# Altium PCB SmartHome V3.PcbDoc (part 1 of 3)
Units mil, origin at the board's own origin, x right, y up, seen from the top; angles counter-clockwise.
Board outline 9055.12 x 5905.51 mil, 2 copper layers (Top Layer, Bottom Layer); 247 components, 227 nets, 963 pads, 444 vias.
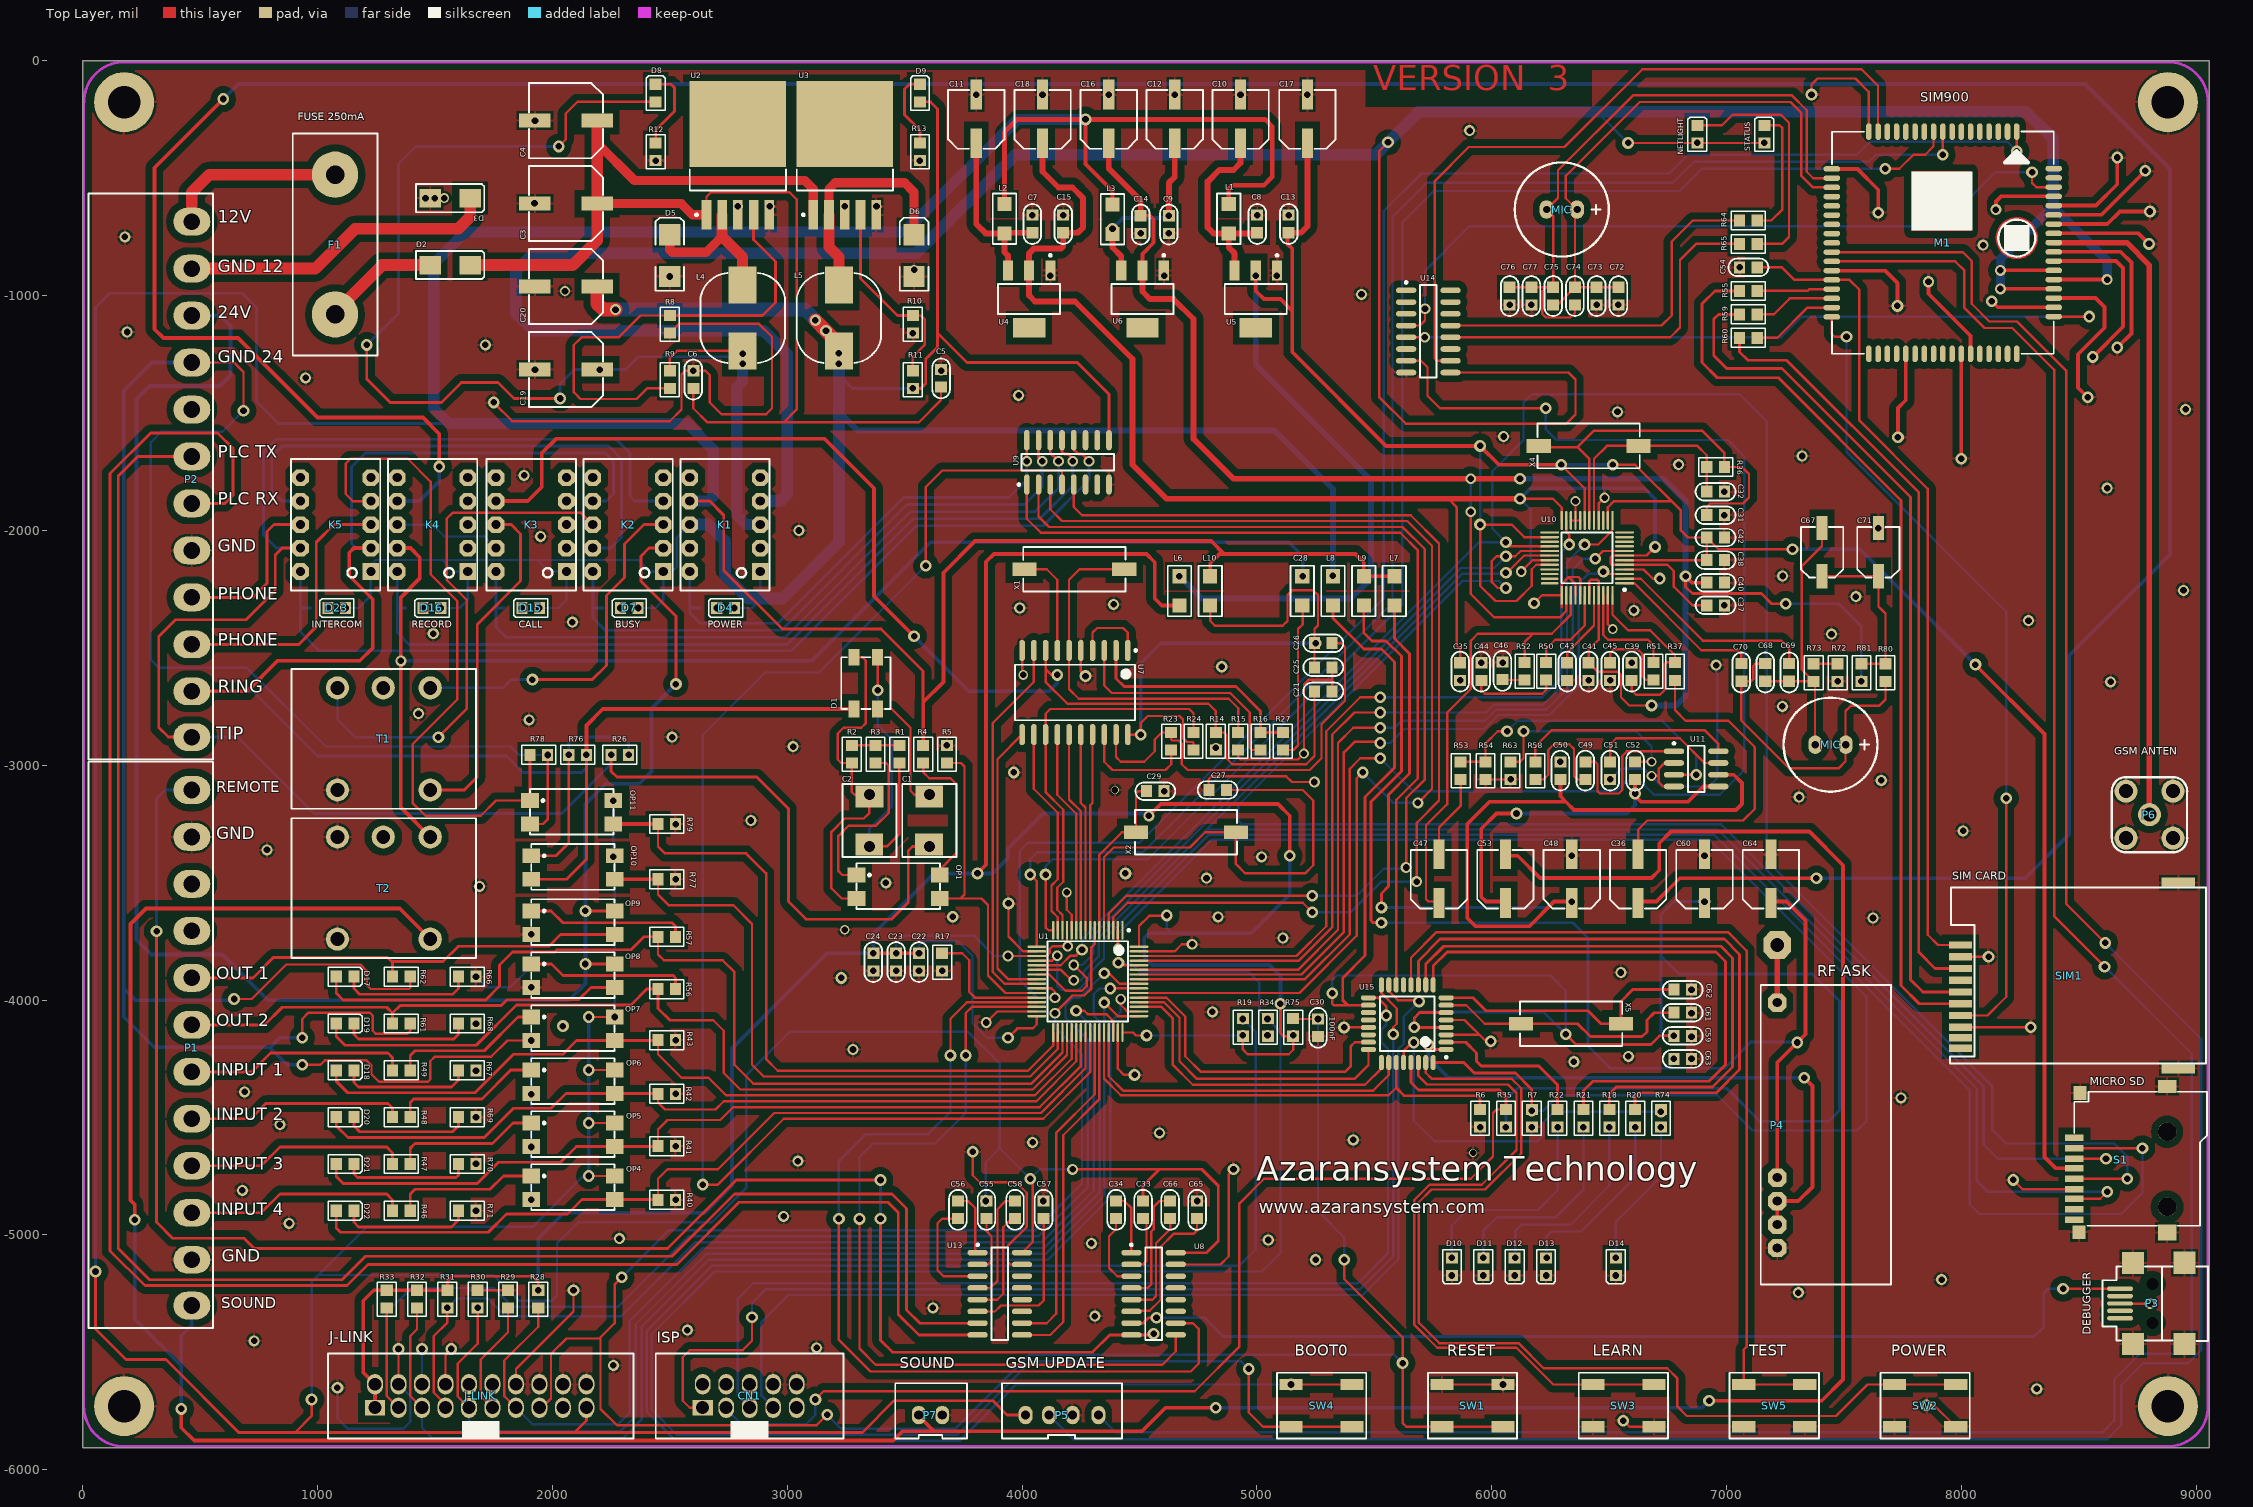
[diagram p0: Top Layer view]
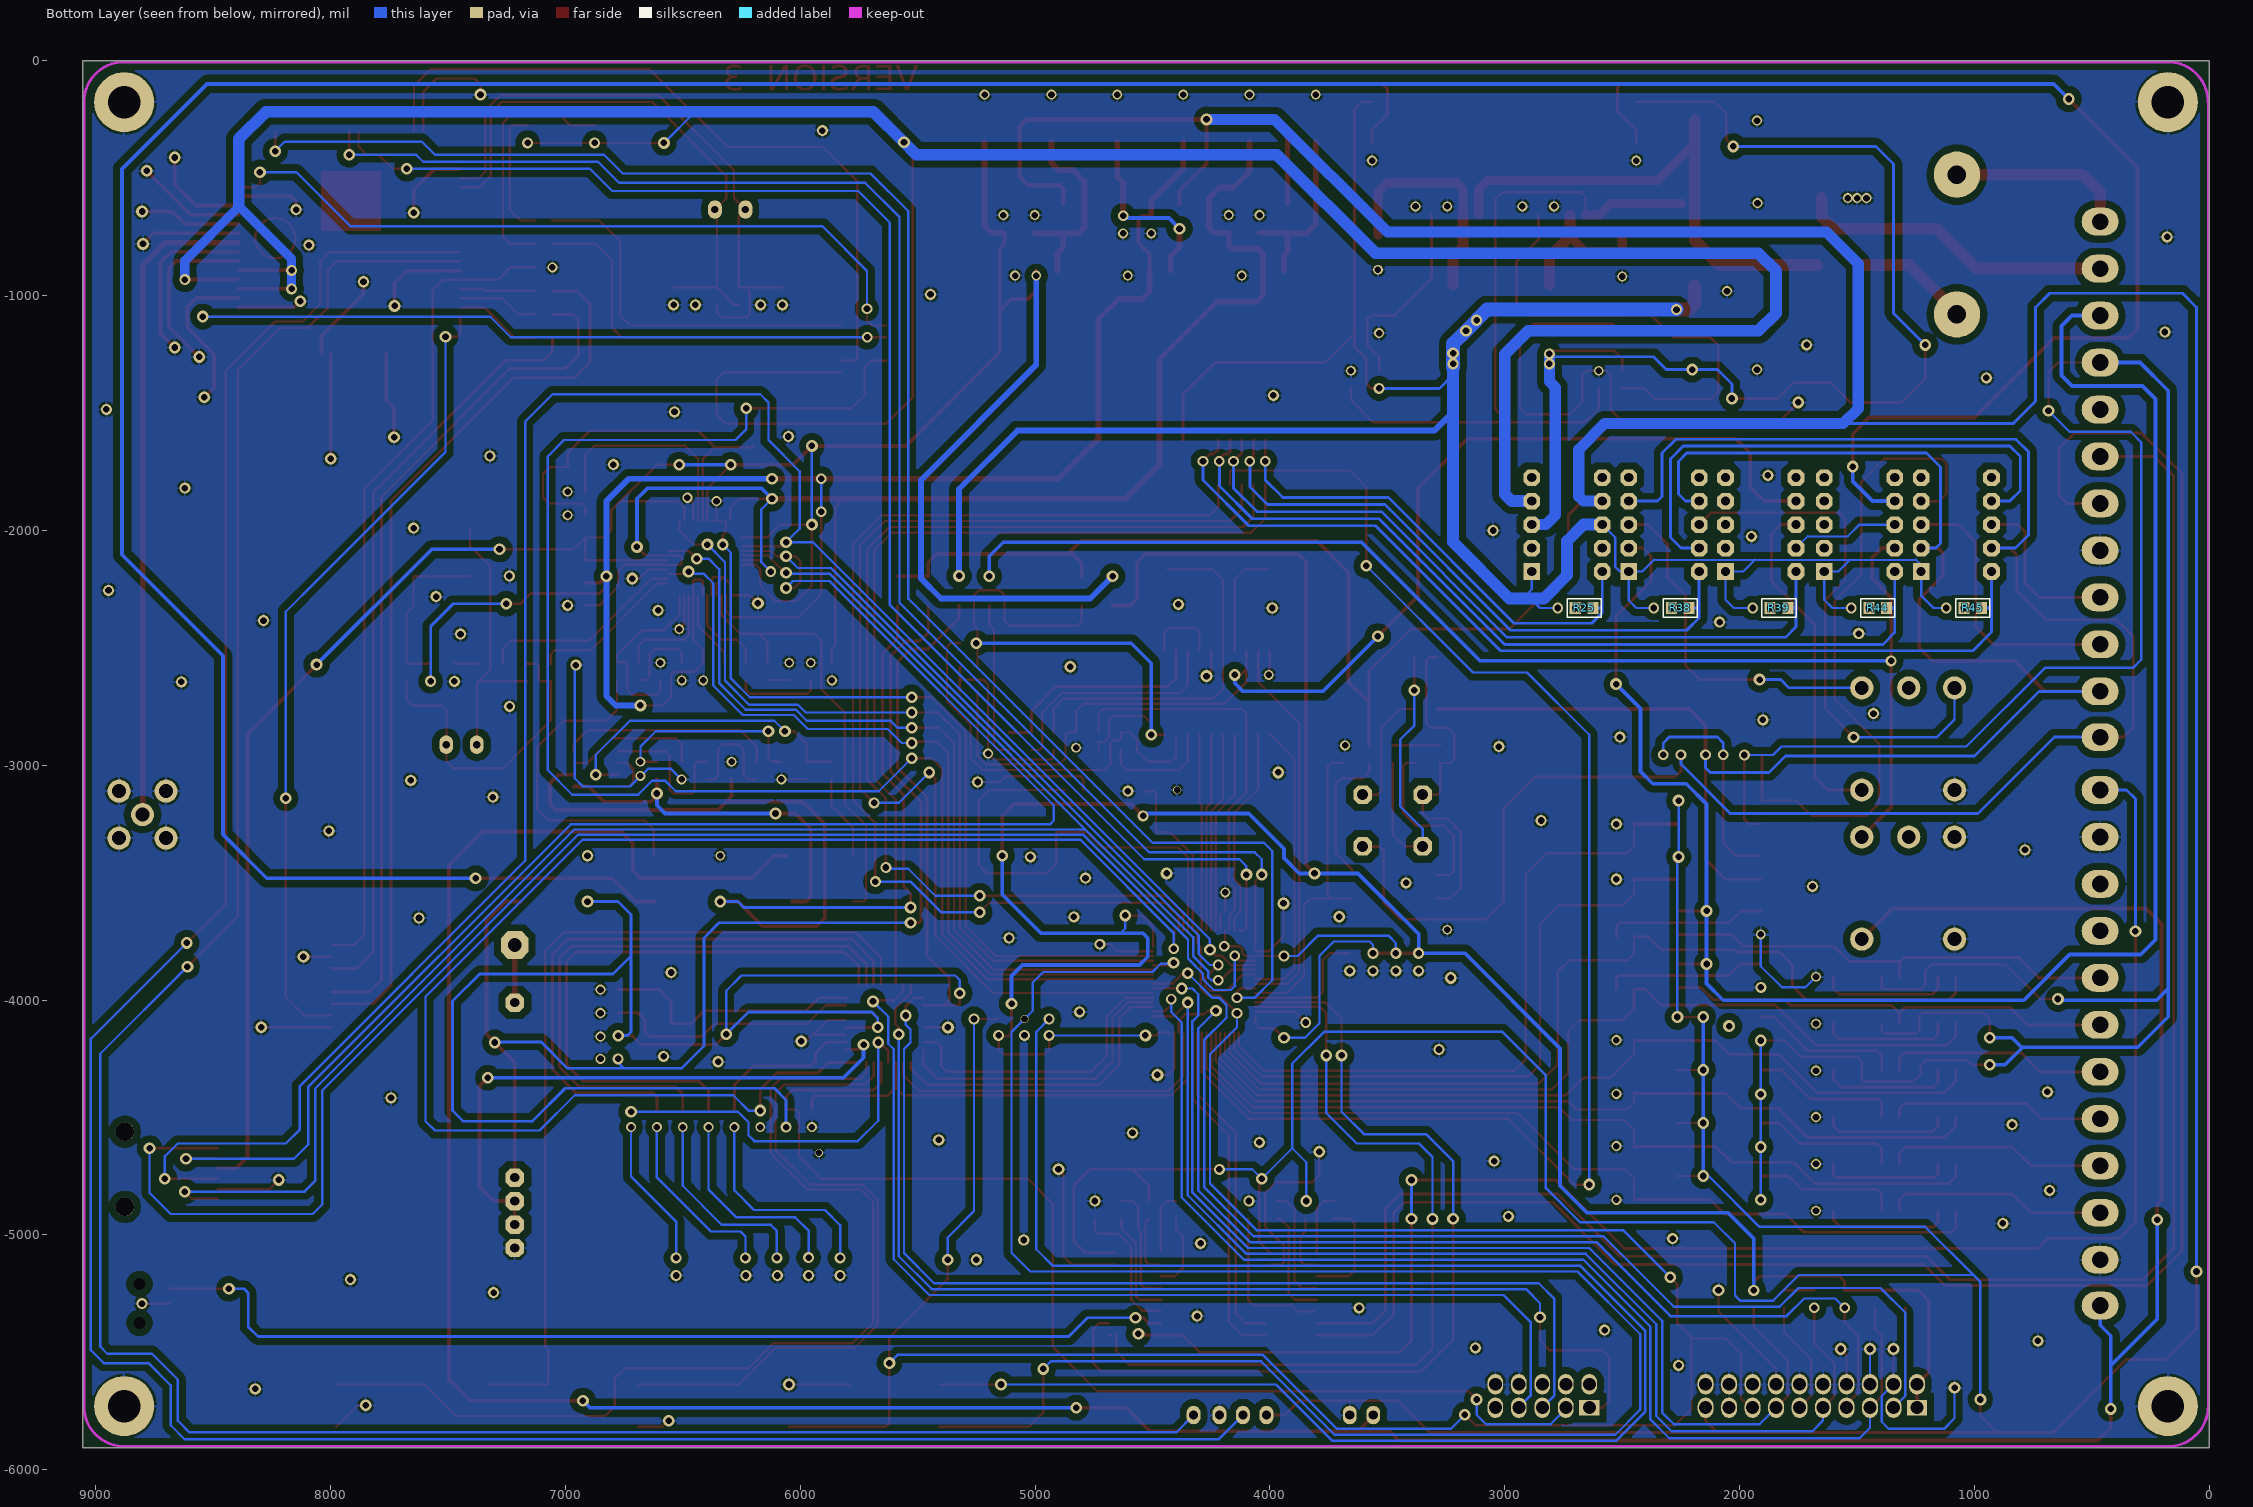
[diagram p1: Bottom Layer view, seen from below]

## Layer stack, top to bottom
Top Layer: signal copper 1.4
Dielectric: dielectric 12.6, FR-4, Dk 4.8
Bottom Layer: signal copper 1.4

## Board outline
0,-5905.51 9055.12,-5905.51 9055.12,0 0,0

## Design rules (kind name [scope] priority, off if disabled: settings)
AssemblyTestPointUsage [All] p1 off:
AssemblyTestpoint [All] p1 off: testpointundercomponent=TRUE minsize=40 maxsize=100 preferedsize=60 minholesize=0 maxholesize=40 preferedholesize=32 testpointgrid=1 usegrid=TRUE gridtolerance=0.01 allowsidetop=TRUE allowsidebottom=TRUE
Clearance [All] p1 off: gap=30
ComponentClearance [All] p1 off: gap=10 collisioncheckmode=3 verticalgap=10 showdistances=FALSE
DiffPairsRouting [All] p1 off: maxlimit=10 minlimit=10 mostfreqgap=10 maxuncoupledlength=500
FabricationTestPointUsage [All] p1 off: valid=0 allowmultiple=FALSE
FabricationTestpoint [All] p1 off: side=3 testpointundercomponent=TRUE minsize=40 maxsize=100 preferedsize=60 minholesize=0 maxholesize=40 preferedholesize=32 testpointgrid=1 allowsidetop=TRUE allowsidebottom=TRUE usegrid=TRUE gridtolerance=0.01
FanoutControl Fanout_BGA [IsBGA] p1 off: bgadir=Out bgaviamode=Centered fanoutstyle=Auto fanoutdirection=Alternating viagrid=1 // Fanout_BGA (Default Rule)
FanoutControl Fanout_LCC [IsLCC] p2 off: bgadir=Out bgaviamode=Centered fanoutstyle=Auto fanoutdirection=Alternating viagrid=1 // Fanout_LCC (Default Rule)
FanoutControl Fanout_SOIC [IsSOIC] p3 off: bgadir=Out bgaviamode=Centered fanoutstyle=Auto fanoutdirection=Alternating viagrid=1 // Fanout_SOIC (Default Rule)
FanoutControl Fanout_Small [(CompPinCount < 5)] p4 off: bgadir=Out bgaviamode=Centered fanoutstyle=Auto fanoutdirection=OutThenIn viagrid=1 // Fanout_Small (Default Rule)
FanoutControl Fanout_Default [All] p5 off: bgadir=Out bgaviamode=Centered fanoutstyle=Auto fanoutdirection=Alternating viagrid=1 // Fanout_Default (Default Rule)
Height [All] p1 off: minheight=0 maxheight=1000 prefheight=500
HoleSize [All] p1 off: absolutevalues=TRUE maxlimit=100 minlimit=1 maxpercent=80.000 minpercent=20.000
HoleToHoleClearance [All] p1 off: gap=10 allowstackedmicrovias=TRUE
LayerPairs [All] p1 off: enforce=TRUE
MinimumSolderMaskSliver [All] p1 off: minsoldermaskwidth=10
NetAntennae [All] p1 off: netantennaetolerance=0
PasteMaskExpansion [All] p1 off: expansion=0
PlaneClearance [All] p1 off: clearance=20
PlaneConnect [All] p1 off: planeconnectstyle=Relief reliefexpansion=20 reliefentries=4 reliefconductorwidth=10 reliefairgap=10
PolygonConnect [All] p1 off: connectstyle=Relief reliefconductorwidth=10 reliefentries=4 polygonreliefangle="90 Angle" airgapwidth=10
RoutingCorners [All] p1 off: cornerstyle=45-Degree minsetback=100 maxsetback=100
RoutingLayers [All] p1 off: top layer_v5=TRUE bottom layer_v5=TRUE
RoutingPriority [All] p1 off: routingpriority=0
RoutingTopology [All] p1 off: topology=Shortest
RoutingVias [All] p1 off: holewidth=31.5 width=62.99 viastyle="Through Hole" minholewidth=28 minwidth=50 maxholewidth=28 maxwidth=50
ShortCircuit [All] p1 off: allowed=FALSE
SilkToSilkClearance [All] p1 off: silktosilkclearance=10
SilkToSolderMaskClearance SilkscreenOverComponentPads [IsPad] p1 off: minsilkscreentomaskgap=10 clearancetoexposedcopper=TRUE
SolderMaskExpansion [All] p1 off: expansion=4
Width [All] p1 off: maxlimit=200 minlimit=8 preferedwidth=10
1 further rules are at their usual default settings.

## Classes and differential pairs
component class VS1003: C31 C32 C35 C36 C37 C38 C39 C40 C41 C42 C43 C44 C45 C46 C47 C48 C49 C50 C51 C52 C53 C67 C68 C69 C70 C71 L7 MIC P7 R36 R37 R50 R51 R52 R53 R54 R58 R63 R72 R73 R80 R81 U10 U11 X4
component class SIM900: C54 C72 C73 C74 C75 C76 C77 M1 MIC NETLIGHT P5 P6 R55 R59 R60 R64 R65 SIM1 STATUS U14
component class "SmartHome V3": C22 C23 C24 C27 C29 C30 C33 C34 C59 C60 C61 C62 C63 C64 C65 C66 CN1 D10 D11 D12 D13 D14 D? J-LINK K1 L6 L8 L9 P1 P2 P3 P4 R6 R7 R17 R18 R19 R20 R21 R22 R28 R29 R30 R31 R32 R33 R34 R35 R74 R75 S1 SW1 SW2 SW3 SW4 SW5 U1 U8 U9 U15 X2 X5
component class PHONE: C1 C2 C21 C25 C26 C28 D1 D4 D7 D15 D16 D23 K2 K3 K4 K5 L10 OP1 OP10 OP11 R1 R2 R3 R4 R5 R14 R15 R16 R23 R24 R25 R26 R27 R38 R39 R44 R45 R76 R77 R78 R79 T1 T2 U7 X1
component class PLC: C55 C56 C57 C58 D17 D18 D19 D20 D21 D22 OP4 OP5 OP6 OP7 OP8 OP9 R40 R41 R42 R43 R46 R47 R48 R49 R56 R57 R61 R62 R66 R67 R68 R69 R70 R71 U13
component class POWER: C3 C4 C5 C6 C7 C8 C9 C10 C11 C12 C13 C14 C15 C16 C17 C18 C19 C20 D2 D3 D5 D6 D8 D9 F1 L1 L2 L3 L4 L5 R8 R9 R10 R11 R12 R13 U2 U3 U4 U5 U6

## Components (designator, comment, footprint, x,y, rotation, side; value= is the part's Value field where it differs from the comment)
C1 "100nF / 100V" RAD-0.3 3605,-3235.51 r270 top
C2 "100nF / 100V" RAD-0.3 3350,-3235.51 r270 top
C3 "470UF / 16V" 470UF-SMD 2186,-608.51 r180 top
C4 "470UF / 16V" 470UF-SMD 2186,-255.51 r180 top
C5 "100nF" 0805C 3655,-1395.51 r90 top
C6 "100nF" 0805C 2600,-1400.51 r90 top
C7 "100nF" 0805C 4043.65,-738.11 r90 top
C8 "100nF" 0805C 5001.15,-738.11 r90 top
C9 "100nF" 0805C 4625,-655.51 r270 top
C10 "100uF / 16V SMD" 100UF-SMD 4930,-345.51 r90 top
C11 "100uF / 16V SMD" 100uf-smd 3805,-345.51 r90 top
C12 "100uF / 16V SMD" 100uf-smd 4650,-345.51 r90 top
C13 "100nF" 0805C 5135,-738.11 r90 top
C14 "100nF" 0805C 4505,-655.51 r270 top
C15 "100nF" 0805C 4175,-738.11 r90 top
C16 "100uF / 16V SMD" 100uf-smd 4369,-345.51 r90 top
C17 "100uF / 16V SMD" 100uf-smd 5215,-345.51 r90 top
C18 "100uF / 16V SMD" 100uf-smd 4087,-345.51 r90 top
C19 "470UF / 16V" 470UF-SMD 2186,-1315.51 r180 top
C20 "470UF / 16V" 470UF-SMD 2186,-962.18 r180 top
C21 "10nF" 0805c 5240,-2685.51 r0 top
C22 "100nF" 0805C 3561.16,-3795.51 r270 top
C23 "100nF" 0805C 3463.82,-3795.51 r270 top
C24 "100nF" 0805C 3366.49,-3795.51 r270 top
C25 "100nF" 0805c 5325,-2583.21 r180 top
C26 "100nF" 0805c 5240,-2480.51 r0 top
C27 "15PF" 0805c 4875,-3105.51 r180 top
C28 "100uF / 100V" 1206 5192.86,-2190.51 r270 top
C29 "15PF" 0805c 4525,-3110.51 r0 top
C30 "100nF" 0805C 5260,-4075.51 r270 top
C31 "33p" 0805c 6910,-1935.51 r0 top
C32 "33p" 0805c 6910,-1835.51 r0 top
C33 "100nF" 0805C 4514.93,-4935.51 r90 top
C34 "100nF" 0805c 4400,-4935.51 r90 top
C35 "100nF" 0805C 5865,-2643.9 r90 top
C36 "100uF / 16V SMD" 100UF-SMD 6622.8,-3580.51 r90 top
C37 "100nF" 0805C 6995,-2319.26 r180 top
C38 "100nF" 0805C 6995,-2126.76 r180 top
C39 "10nF" 0805C 6595.33,-2643.9 r90 top
C40 "100nF" 0805C 6995,-2223.01 r180 top
C41 "100nF" 0805C 6412.38,-2643.9 r90 top
C42 "100nF" 0805C 6995,-2030.51 r180 top
C43 "100nF" 0805C 6320.9,-2643.9 r90 top
C44 "10nF" 0805C 5955,-2643.9 r90 top
C45 "10nF" 0805C 6504.06,-2558.9 r270 top
C46 "10nF" 0805C 6045,-2640.51 r90 top
C47 "100uF / 16V SMD" 100UF-SMD 5775,-3580.51 r90 top
C48 "100uF / 16V SMD" 100uf-smd 6340.2,-3580.51 r90 top
C49 "100nF" 0805C 6397.94,-3065.51 r90 top
C50 "100nF" 0805c 6292.01,-3065.51 r90 top
C51 "100nF" 0805c 6503.87,-3065.51 r90 top
C52 "100nF" 0805c 6610,-2980.51 r270 top
C53 "100uF / 16V SMD" 100UF-SMD 6057.6,-3580.51 r90 top
C54 "100nF" 0805C 7135,-880.51 r180 top
C55 "100nF" 0805C 3848.2,-4935.51 r90 top
C56 "100nF" 0805c 3726.6,-4935.51 r90 top
C57 "100nF" 0805c 4091.6,-4850.51 r270 top
C58 "100nF" 0805c 3970,-4850.51 r270 top
C59 "100nF" 0805C 6770,-4152.18 r0 top
C60 "100uF / 16V SMD" 100UF-SMD 6905.4,-3580.51 r90 top
C61 "15PF" 0805c 6770,-4053.85 r0 top
C62 "15PF" 0805c 6770,-3955.51 r0 top
C63 "100nF" 0805C 6770,-4250.51 r0 top
C64 "100uF / 16V SMD" 100UF-SMD 7188,-3580.51 r90 top
C65 "100nF" 0805c 4745,-4850.51 r270 top
C66 "100nF" 0805c 4630.07,-4850.51 r270 top
C67 "10uF" 10UF-SMD 7406,-2170.51 r90 top
C68 "100pF" 0805C 7164.08,-2562.51 r270 top
C69 "100nF" 0805C 7265.76,-2647.51 r90 top
C70 "100nF" 0805C 7062,-2647.51 r90 top
C71 "10uF" 10UF-SMD 7646,-2170.51 r90 top
C72 "33P" 0805C 6539,-1045 r90 top
C73 "15PF" 0805C 6446.36,-1045 r90 top
C74 "33P" 0805C 6353.92,-960 r270 top
C75 "15PF" 0805C 6261.08,-1045 r90 top
C76 "33P" 0805C 6076,-960 r270 top
C77 "15PF" 0805C 6168.64,-960 r270 top
CN1 "ISP" IDC2.54-V10D 2840,-5685.51 r0 top locked
D1 "HD08-T" HD08-T 3385,-2540.51 r270 top
D2 "Diode" Diode 1580,-870.51 r0 top
D3 "Diode" Diode 1580,-585.51 r0 top
D4 "LED" 0805d 2775,-2330.51 r180 top
D5 "1N5822" SMB 2500,-830.51 r90 top
D6 "1N5822" SMB 3540,-830.51 r90 top
D7 "LED" 0805d 2365,-2330.51 r180 top
D8 "LED" 0805D 2440,-175.51 r90 top
D9 "LED" 0805D 3565,-175.51 r90 top
D10 "LED" 0805D 5830,-5097.51 r270 top
D11 "LED" 0805D 5963.67,-5097.51 r270 top
D12 "LED" 0805D 6097.33,-5097.51 r270 top
D13 "LED" 0805D 6231,-5097.51 r270 top
D14 "LED" 0805D 6528,-5097.51 r270 top
D15 "LED" 0805d 1945,-2330.51 r180 top
D16 "LED" 0805d 1525,-2330.51 r180 top
D17 "LED" 0805D 1080,-3900.51 r0 top
D18 "LED" 0805D 1080,-4299.08 r0 top
D19 "LED" 0805D 1080,-4099.8 r0 top
D20 "LED" 0805D 1080,-4498.37 r0 top
D21 "LED" 0805D 1080,-4697.65 r0 top
D22 "LED" 0805D 1080,-4896.94 r0 top
D23 "LED" 0805d 1120,-2330.51 r180 top
F1 "FUSE 3A" FUSE 1075,-485.51 r270 top
J-LINK "IDC 20" IDC2.54-V20D 1695,-5685.51 r0 top locked
K1 "RELAY 5V" "RELAY G6H" 2885,-2175.51 r180 top locked
K2 "RELAY 5V" "RELAY G6H" 2472.5,-2175.51 r180 top locked
K3 "RELAY 5V" "RELAY G6H" 2060,-2175.51 r180 top locked
K4 "RELAY 5V" "RELAY G6H" 1640,-2175.51 r180 top locked
K5 "RELAY 5V" "RELAY G6H" 1227.5,-2175.51 r180 top locked
L1 "FREAT" 1206 4880,-605.51 r270 top
L2 "FREAT" 1206 3925,-605.51 r270 top
L3 "FREAT" 1206 4385,-607.91 r270 top
L4 "100UH" "100UH 1" 2810,-960.51 r270 top
L5 "100UH" "100UH 1" 3220,-960.51 r270 top
L6 "FREAT" 1206 4670,-2325.51 r90 top
L7 "FREAT" 1206 5585,-2325.51 r90 top
L8 "FREAT" 1206 5323.57,-2325.51 r90 top
L9 "FREAT" 1206 5455,-2190.51 r270 top
L10 "FREAT" 1206 4800.71,-2325.51 r90 top
M1 "sim900" sim900 7920,-775.51 r270 top
MIC "CON 2PIN" Microphone 6298,-634 r0 top
MIC "CON 2PIN" Microphone 7442,-2912.51 r0 top
NETLIGHT "LED" 0805D 6875,-350.51 r90 top
OP1 "EL817" EL817 3295,-3467.66 r0 top
OP4 "EL817" EL817 1910,-4749.08 r0 top
OP5 "EL817" EL817 1910,-4523.37 r0 top
OP6 "EL817" EL817 1910,-4297.66 r0 top
OP7 "EL817" EL817 1910,-4071.94 r0 top
OP8 "EL817" EL817 1910,-3846.23 r0 top
OP9 "EL817" EL817 1910,-3620.51 r0 top
OP10 "EL817" EL817 1910,-3385.51 r0 top
OP11 "EL817" EL817 1905,-3150.51 r0 top
P1 "FONIX-12" Fonit_Conector 465,-3105.51 r270 top locked
P2 "FONIX-12" Fonit_Conector 465,-685.51 r270 top locked
P3 "Mini USB" miniusb 8714.12,-5118.51 r0 top
P4 "RF ASK" ASK-RF 7215,-5055.51 r90 top locked
P5 "CON 4" CON_4PIN 4015,-5766.61 r0 top
P6 "GSM ANTEN" anten-jack 8800,-3210.51 r0 top
P7 "CON 2PIN" CON_2PIN 3560,-5766.61 r0 top
R1 "2.2K" 0805 3477.5,-2990.51 r90 top
R2 "100K" 0805 3275,-2915.51 r270 top
R3 "330R" 0805 3376.25,-2915.51 r270 top
R4 "330R" 0805 3578.75,-2990.51 r90 top
R5 "10K" 0805 3680,-2915.51 r270 top
R6 "10K" 0805 5950,-4465.51 r270 top
R7 "10K" 0805 6170,-4465.51 r270 top
R8 "4.7K" 0805 2500,-1160.51 r90 top
R9 "10K" 0805 2500,-1395.51 r90 top
R10 "3.3K" 0805 3535,-1160.51 r90 top
R11 "10K" 0805 3535,-1320.51 r270 top
R12 "1K" 0805 2440,-350.51 r270 top
R13 "1K" 0805 3565,-350.51 r270 top
R14 "10K" 0805 4825,-2935.51 r90 top
R15 "4.7M" 0805 4920,-2935.51 r90 top
R16 "100K" 0805 5015,-2935.51 r90 top
R17 "10K" 0805 3660,-3875.51 r90 top
R18 "1K" 0805 6500,-4465.51 r270 top
R19 "10K" 0805 4940,-4078.9 r270 top
R20 "1K" 0805 6610,-4465.51 r270 top
R21 "1K" 0805 6390,-4465.51 r270 top
R22 "1K" 0805 6280,-4465.51 r270 top
R23 "374K" 0805 4635,-2860.51 r270 top
R24 "3.3K" 0805 4730,-2935.51 r90 top
R25 "1K" 0805 2700,-2330.51 r180 bottom
R26 "47K" 0805 2325,-2955.51 r180 top
R27 "100K" 0805 5110,-2860.51 r270 top
R28 "10K" 0805 1940,-5310.51 r90 top
R29 "10K" 0805 1811,-5310.51 r90 top
R30 "10K" 0805 1682,-5310.51 r90 top
R31 "10K" 0805 1553,-5310.51 r90 top
R32 "10K" 0805 1424,-5310.51 r90 top
R33 "10K" 0805 1295,-5310.51 r90 top
R34 "1K" 0805 5047.17,-4078.9 r270 top
R35 "3.3K" 0805 6060,-4465.51 r270 top
R36 "1M" 0805 6915,-1730.51 r0 top
R37 "470R" 0805 6780,-2563.51 r270 top
R38 "1K" 0805 2290,-2330.51 r180 bottom
R39 "1K" 0805 1870,-2330.51 r180 bottom
R40 "10K" 0805 2450,-4850.51 r0 top
R41 "10K" 0805 2450,-4621.94 r0 top
R42 "10K" 0805 2450,-4399.08 r0 top
R43 "10K" 0805 2450,-4170.51 r0 top
R44 "1K" 0805 1450,-2330.51 r180 bottom
R45 "1K" 0805 1045,-2330.51 r180 bottom
R46 "10K" 0805 1320,-4896.94 r0 top
R47 "10K" 0805 1320,-4697.65 r0 top
R48 "10K" 0805 1320,-4498.37 r0 top
R49 "10K" 0805 1320,-4299.08 r0 top
R50 "22R" 0805 6231.14,-2637.28 r90 top
R51 "22R" 0805 6688.52,-2637.28 r90 top
R52 "22R" 0805 6139.67,-2637.28 r90 top
R53 "1K" 0805 5867.21,-3060.51 r90 top
R54 "100R" 0805 5973.14,-2985.51 r270 top
R55 "22R" 0805 7055,-980.51 r0 top
R56 "1K" 0805 2525,-3953.37 r180 top
R57 "1K" 0805 2525,-3730.51 r180 top
R58 "100K" 0805 6185,-3060.51 r90 top
R59 "22R" 0805 7130,-1080.51 r180 top
R60 "22R" 0805 7130,-1180.51 r180 top
R61 "10K" 0805 1395,-4099.8 r180 top
R62 "10K" 0805 1395,-3900.51 r180 top
R63 "100R" 0805 6079.07,-2985.51 r270 top
R64 "1K" 0805 7130,-680.51 r180 top
R65 "1K" 0805 7130,-780.51 r180 top
R66 "1K" 0805 1600,-3900.51 r0 top
R67 "1K" 0805 1600,-4299.08 r0 top
R68 "1K" 0805 1600,-4099.8 r0 top
R69 "1K" 0805 1600,-4498.37 r0 top
R70 "1K" 0805 1600,-4697.65 r0 top
R71 "1K" 0805 1600,-4896.94 r0 top
R72 "1K" 0805 7472.24,-2567.9 r270 top
R73 "1K" 0805 7370.36,-2642.9 r90 top
R74 "1K" 0805 6720,-4465.51 r270 top
R75 "4.7K" 0805 5154.34,-4078.9 r270 top
R76 "10K" 0805 2070,-2955.51 r0 top
R77 "4.7K" 0805 2450,-3485.51 r0 top
R78 "220" 0805 1905,-2955.51 r0 top
R79 "4.7K" 0805 2450,-3250.51 r0 top
R80 "1K" 0805 7676,-2567.9 r270 top
R81 "1K" 0805 7574.12,-2642.9 r90 top
S1 "MICRO SD" MicroSD 8500,-4585.51 r0 top locked
SIM1 "SIM CARD SOKET" "SIM HOLDER 2" 8000,-3765.51 r0 top locked
STATUS "LED" 0805D 7160,-350.51 r90 top
SW1 "SWITCH" SWICH 5917.5,-5726.61 r90 top
SW2 "SWITCH" SWICH 7845,-5726.61 r270 top
SW3 "SWITCH" SWICH 6560,-5726.61 r270 top
SW4 "SWITCH" SWICH 5275,-5726.61 r90 top
SW5 "SWITCH" SWICH 7202.5,-5726.61 r270 top
T1 "TRANCE 300 :300" trance 1480,-3105.51 r180 top locked
T2 "TRANCE 300 :300" trance 1480,-3740.51 r180 top locked
U1 "STM32F103RBT6" LQFP64_L 4280,-3920.51 r270 top locked
U2 "LM2576S-ADJ" TS5B_N 2790,-420.59 r90 top
U3 "LM2576S-ADJ" TS5B_N 3245,-420.59 r90 top
U4 "AMS1117-2.5V" sot223 4030,-1015.51 r180 top
U5 "AMS1117-3.3V" sot223 4995,-1015.51 r180 top
U6 "AMS1117-2.8V" sot223 4512.5,-1015.51 r180 top
U7 "MT8888CS" SOIC20_N 4225,-2690.51 r270 top locked
U8 "MAX232DR" L16_N 4560,-5250.51 r0 top locked
U9 "ULN2003L" L16_N 4195,-1710.51 r90 top
U10 "VS1003" 48A 6565,-2225.51 r180 top locked
U11 "LM386M" M08A_N 6870,-3015.51 r0 top locked
U13 "MAX232DR" L16_N 3905,-5250.51 r0 top locked
U14 "ULN2003L" L16_N 5729.51,-1153 r0 top
U15 "ATmega8A-AU" 32A_N 5640,-4100.51 r180 top locked
X1 "3.579545 MHz" crystal 4435,-2165.51 r180 top locked
X2 "8MHz" crystal 4485,-3285.51 r0 top
X4 "12.288MHz" crystal 6625,-1640.51 r180 top
X5 "16MHz" crystal 6125,-4100.51 r0 top locked

## Footprints (in the part's own frame and the unit in brackets; to place one, negate y for a bottom-side part, rotate by r counter-clockwise, add the part's x,y. Pads: shape width x height; smd on the part's side, far side on the other; paste and mask are expansions set on the pad)
10UF-SMD [mm]
  rect 2.6x1.2 smd: 1(-0.635,0) 2(4.572,0)
  silkscreen extent -0.76,-2.29 4.7,2.29
32A_N [mm] "Thin QFP, 32-Leads, Body 7x7mm, Pitch 0.8mm, IPC Medium Density"
  oval 1.65x0.55 smd: 1(-4.2,2.8) 2(-4.2,2) 3(-4.2,1.2) 4(-4.2,0.4) 5(-4.2,-0.4) 6(-4.2,-1.2) 7(-4.2,-2) 8(-4.2,-2.8) 17(4.2,-2.8) 18(4.2,-2) 19(4.2,-1.2) 20(4.2,-0.4) 21(4.2,0.4) 22(4.2,1.2) 23(4.2,2) 24(4.2,2.8)
  oval 0.55x1.65 smd: 9(-2.8,-4.2) 10(-2,-4.2) 11(-1.2,-4.2) 12(-0.4,-4.2) 13(0.4,-4.2) 14(1.2,-4.2) 15(2,-4.2) 16(2.8,-4.2) 25(2.8,4.2) 26(2,4.2) 27(1.2,4.2) 28(0.4,4.2) 29(-0.4,4.2) 30(-1.2,4.2) 31(-2,4.2) 32(-2.8,4.2)
  silkscreen extent -4.33,-2.95 2.95,3.75, body extent -3.5,-3.5 3.5,3.5, height 1.2
48A [mil]
  oval 80x10 smd: 1(0,0) 2(0,-19.69) 3(0,-39.37) 4(0,-59.06) 5(0,-78.74) 6(0,-98.43) 7(0,-118.11) 8(0,-137.8) 9(0,-157.48) 10(0,-177.17) 11(0,-196.85) 12(0,-216.54) 25(318.9,-216.54) 26(318.9,-196.85) 27(318.9,-177.17) 28(318.9,-157.48) 29(318.9,-137.8) 30(318.9,-118.11) 31(318.9,-98.43) 32(318.9,-78.74) 33(318.9,-59.06)
  oval 10x80 smd: 13(51.18,-267.72) 14(70.87,-267.72) 15(90.55,-267.72) 16(110.24,-267.72) 17(129.92,-267.72) 18(149.61,-267.72) 19(169.29,-267.72) 20(188.98,-267.72) 21(208.66,-267.72) 22(228.35,-267.72) 23(248.03,-267.72) 24(267.72,-267.72) 37(267.72,51.18) 38(248.03,51.18) 39(228.35,51.18) 40(208.66,51.18) 41(188.98,51.18) 42(169.29,51.18) 43(149.61,51.18) 44(129.92,51.18) 45(110.24,51.18) 46(90.55,51.18) 47(70.87,51.18) 48(51.18,51.18)
  oval 75x10 smd: 34(318.9,-39.37) 35(318.9,-19.69) 36(318.9,0)
  silkscreen extent -5,-217 268,32
100UF-SMD [mm]
  rect 3.2x1.2 smd: 1(-0.152,0) 2(5.105,0)
  silkscreen extent -0.76,-3.05 5.59,3.05
100uf-smd [mm]
  rect 3.2x1.2 smd: 1(-0.152,0) 2(5.105,0)
  silkscreen extent -0.76,-3.05 5.59,3.05
"100UH 1" [mm]
  rect 4x3 smd: 1(-0.127,0) 2(7.01,0)
  silkscreen extent -1.43,-4.56 8.3,4.57
470UF-SMD [mm]
  rect 3.4x1.5 smd: 1(-0.127,0) 2(6.604,0)
  silkscreen extent -0.76,-4.06 7.24,4.06
0805 [mm]
  rect 1.2x1.3 smd: 1(0,0) 2(1.905,0)
  silkscreen extent -0.89,-1.02 2.79,1.02
0805C [mm]
  rect 1.2x1.3 smd: 1(0.127,0) 2(2.032,0)
  silkscreen extent -1.07,-0.95 3.23,0.95
0805c [mm]
  rect 1.2x1.3 smd: 1(0.127,0) 2(2.032,0)
  silkscreen extent -1.07,-0.95 3.23,0.95
0805d [mm] "SM LED; 2 C-Bend Leads; Body 3.5 x 2.8 x 1.9 mm, inc leads (LxWxH typ)"
  rect 1.2x1.3 smd: 1(0,0) 2(1.905,0)
  silkscreen extent -0.89,-1.02 2.79,1.02
0805D [mm] "SM LED; 2 C-Bend Leads; Body 3.5 x 2.8 x 1.9 mm, inc leads (LxWxH typ)"
  rect 1.2x1.3 smd: 1(0,0) 2(1.905,0)
  silkscreen extent -0.89,-1.02 2.79,1.02
1206 [mil]
  rect 60x60 smd: 1(5,0) 2(130,0)
  silkscreen extent -40,-50 175,50
anten-jack [mm]
  round 2.5 hole 1.5: 1(0,0) 2(-2.54,-2.54) 2(-2.54,2.54) 2(2.54,-2.54) 2(2.54,2.54)
  silkscreen extent -4.06,-4.06 4.07,4.07
ASK-RF [mm] "Connector; Header; 4 Position"
  oct 2x2 hole 1: 1(0,0) 2(2.54,0) 3(5.08,0) 4(7.62,0) 5(26.543,0)
  silkscreen extent -3.94,-12.32 28.45,1.78
CON_2PIN [mm] "Connector; Header; 2 Position; Right Angle"
  oval 1.5x2 hole 1: 1(0,0) 2(2.54,0)
  silkscreen extent -2.54,-2.54 5.21,3.43
CON_4PIN [mm]
  oval 1.5x2 hole 1: 1(0,0) 2(2.54,0) 3(5.08,0) 4(7.874,0)
  silkscreen extent -2.54,-2.54 10.41,3.43
crystal [mm]
  rect 2.6x1.5 smd: 1(0,0) 2(10.8,0)
  silkscreen extent -0.13,-2.41 10.92,2.41
Diode [mm] "DO-214-AA/SMB; 2 C-Bend Leads; Body 5.3 x 3.6 mm, inc. leads (LxW)"
  rect 2.3x2 smd: 1(-2.54,0) 2(1.778,0)
  silkscreen extent -4.06,-1.52 3.3,1.52
EL817 [mm]
  rect 1.9x1.6 smd: 1(0,0) 2(0,-2.54) 3(9.017,-2.54) 4(9.017,0)
  silkscreen extent 0,-3.68 9.02,1.27
Fonit_Conector [mm]
  oval 3x4 hole 1.8: 1(0,0) 2(5.08,0) 3(10.16,0) 4(15.24,0) 5(20.32,0) 6(25.4,0) 7(30.48,0) 8(35.56,0) 9(40.64,0) 10(45.72,0) 11(50.8,0) 12(55.753,0)
  silkscreen extent -3.05,-11.18 58.17,2.29
FUSE [mm]
  round 5 hole 2: 1(0,0) 2(15.113,0)
  silkscreen extent -4.45,-4.57 19.56,4.57
HD08-T [mm]
  rect 1.8x1.2 smd: 1(0,0) 2(5.588,0) 3(0,-2.54) 4(5.588,-2.54)
  silkscreen extent 0,-3.94 5.59,1.4
IDC2.54-V10D [mm] "Connector; IDC, Low Profile Male Header, Thru-Hole; 10 Position; Vertical; Pitch 2.54 mm; Body 20.32 x 9.2 x 9.45 mm (LxWxH)"
  rect 2.2x1.7 hole 1.4: 1(-5.08,-1.27)
  oval 1.7x2.2 hole 1.4: 2(-5.08,1.27) 3(-2.54,-1.27) 4(-2.54,1.27) 5(0,-1.27) 6(0,1.27) 7(2.54,-1.27) 8(2.54,1.27) 9(5.08,-1.27) 10(5.08,1.27)
  silkscreen extent -10.16,-4.6 10.16,4.6, body extent -10.16,-4.6 10.16,4.6, height 9.45
IDC2.54-V20D [mm] "Connector; IDC, Low Profile Male Header, Thru-Hole; 20 Position; Vertical; Pitch 2.54 mm; Body 33.02 x 9.2 x 9.45 mm (LxWxH)"
  rect 2.2x1.7 hole 1.4: 1(-11.43,-1.27)
  oval 1.7x2.2 hole 1.4: 2(-11.43,1.27) 3(-8.89,-1.27) 4(-8.89,1.27) 5(-6.35,-1.27) 6(-6.35,1.27) 7(-3.81,-1.27) 8(-3.81,1.27) 9(-1.27,-1.27) 10(-1.27,1.27) 11(1.27,-1.27) 12(1.27,1.27) 13(3.81,-1.27) 14(3.81,1.27) 15(6.35,-1.27) 16(6.35,1.27) 17(8.89,-1.27) 18(8.89,1.27) 19(11.43,-1.27) 20(11.43,1.27)
  silkscreen extent -16.51,-4.6 16.51,4.6, body extent -16.51,-4.6 16.51,4.6, height 9.45
L16_N [mm] "SOIC, 16-Leads, Body 9.9x3.9mm, Pitch 1.27mm, IPC Medium Density"
  oval 2.2x0.6 smd: 1(-2.4,4.445) 2(-2.4,3.175) 3(-2.4,1.905) 4(-2.4,0.635) 5(-2.4,-0.635) 6(-2.4,-1.905) 7(-2.4,-3.175) 8(-2.4,-4.445) 9(2.4,-4.445) 10(2.4,-3.175) 11(2.4,-1.905) 12(2.4,-0.635) 13(2.4,0.635) 14(2.4,1.905) 15(2.4,3.175) 16(2.4,4.445)
  silkscreen extent -2.52,-5 0.9,5.42, body extent -1.95,-4.95 1.95,4.95, height 1.75
LQFP64_L [mil] "Thin QFP, 64-Leads, Body 10x10mm, Pitch 0.5mm, IPC High Density"
  oval 80x10 smd: 1(-217.52,147.64) 2(-217.52,127.95) 3(-217.52,108.27) 4(-217.52,88.58) 5(-217.52,68.9) 6(-217.52,49.21) 7(-217.52,29.53) 8(-217.52,9.84) 9(-217.52,-9.84) 10(-217.52,-29.53) 11(-217.52,-49.21) 12(-217.52,-68.9) 13(-217.52,-88.58) 14(-217.52,-108.27) 15(-217.52,-127.95) 16(-217.52,-147.64) 33(217.52,-147.64) 34(217.52,-127.95) 35(217.52,-108.27) 36(217.52,-88.58) 37(217.52,-68.9) 38(217.52,-49.21) 39(217.52,-29.53) 40(217.52,-9.84) 41(217.52,9.84) 42(217.52,29.53) 43(217.52,49.21) 44(217.52,68.9) 45(217.52,88.58) 46(217.52,108.27) 47(217.52,127.95) 48(217.52,147.64)
  oval 10x80 smd: 17(-147.64,-217.52) 18(-127.95,-217.52) 19(-108.27,-217.52) 20(-88.58,-217.52) 21(-68.9,-217.52) 22(-49.21,-217.52) 23(-29.53,-217.52) 24(-9.84,-217.52) 25(9.84,-217.52) 26(29.53,-217.52) 27(49.21,-217.52) 28(68.9,-217.52) 29(88.58,-217.52) 30(108.27,-217.52) 31(127.95,-217.52) 32(147.64,-217.52) 49(147.64,217.52) 50(127.95,217.52) 51(108.27,217.52) 52(88.58,217.52) 53(68.9,217.52) 54(49.21,217.52) 55(29.53,217.52) 56(9.84,217.52) 57(-9.84,217.52) 58(-29.53,217.52) 59(-49.21,217.52) 60(-68.9,217.52) 61(-88.58,217.52) 62(-108.27,217.52) 63(-127.95,217.52) 64(-147.64,217.52)
  silkscreen extent -222,-171 171,179, body extent -197,-197 197,197, height 63
M08A_N [mm] "SOIC, 8-Leads, Body 4.9x3.9mm, Pitch 1.27mm, IPC Medium Density"
  oval 2.2x0.6 smd: 1(-2.4,1.905) 2(-2.4,0.635) 3(-2.4,-0.635) 4(-2.4,-1.905) 5(2.4,-1.905) 6(2.4,-0.635) 7(2.4,0.635) 8(2.4,1.905)
  silkscreen extent -2.52,-2.5 0.9,2.88, body extent -2,-2.5 2,2.5, height 1.75
Microphone [mm]
  oval 1.5x2 hole 0.8: 1(-1.651,0) 2(1.651,0)
  silkscreen extent -5.08,-5.08 5.08,5.08
MicroSD [mm]
  rect 2x0.7 smd: 1(-0.508,-1.143) 2(-0.508,-2.286) 4(-0.508,-3.302) 5(-0.508,-4.445) 6(-0.508,-5.588) 7(-0.508,-6.604) 8(-0.508,-7.747) 9(-0.508,0) 10(-0.508,-8.89)
  rect 1.4x1.5 smd: 6(0,-10.236) 6(0.127,4.826)
  rect 2x1.7 smd: 6(9.525,-10.262)
  rect 2x1.4 smd: 6(9.525,5.512)
  round 2 hole 2: ""(9.525,-7.493) ""(9.525,0.635)
  silkscreen extent -0.51,-9.53 13.84,4.95
miniusb [mm] "Connector; Header; 4 Position"
  oval 2.8x0.483 smd: 1(-1,-6) 2(-1,-5.2) 3(-1,-4.4) 4(-1,-3.6) 5(-1,-2.8)
  rect 2.4x2.4 smd: 6(0.406,-8.788) 6(0.406,-0.025) 6(5.969,-8.788) 6(5.969,0)
  round 0 hole 1.3: ""(2.5,-6.5) ""(2.5,-2.3)
  silkscreen extent -2.9,-8.46 8.52,-0.4
RAD-0.3 [mm] "Capacitor; 2 Leads"
  oct 2x2 hole 1.2: 1(-2.794,0) 2(2.794,0)
  rect 2.4x3 smd: 1(-2.591,0) 2(2.591,-0.025)
  silkscreen extent -3.94,-2.92 3.94,2.92
"RELAY G6H" [mm]
  oct 1.8x1.8 hole 1: 1(7.62,0) 2(0,-7.62) 3(0,-5.08) 4(0,-2.54) 5(0,-10.16) 6(7.62,-10.16) 7(7.62,-2.54) 8(7.62,-5.08) 9(7.62,-7.62)
  rect 1.8x1.8 hole 1: 10(0,0)
  silkscreen extent -1.02,-12.19 8.64,2.03
sim900 [mm]
  oval 1.8x0.6 smd mask+0.102: 1(-12.016,7.981) 2(-12.016,7) 3(-12.016,6) 4(-12.016,5) 5(-12.016,4) 6(-12.016,3) 7(-12.016,2) 8(-12.016,1) 9(-12.016,0) 10(-12.016,-1) 11(-12.016,-2) 12(-12.016,-3) 13(-12.016,-4) 14(-12.016,-5) 15(-12.016,-6) 16(-12.016,-7) 17(-12.016,-8) 35(12.016,-8) 36(12.016,-7) 37(12.016,-6) 38(12.016,-5) 39(12.016,-4) 40(12.016,-3) 41(12.016,-2) 42(12.016,-1) 43(12.016,0) 44(12.016,1) 45(12.016,1.994) 46(12.016,3) 47(12.016,4) 48(12.016,5) 49(12.016,6) 50(12.016,7) 51(12.016,8)
  oval 0.6x1.8 smd mask+0.102: 18(-7.984,-12) 19(-6.984,-12) 20(-5.984,-12) 21(-4.984,-12) 22(-3.984,-12) 23(-2.984,-12) 24(-1.985,-12) 25(-0.985,-12) 26(0.015,-12) 27(1.015,-12) 28(2.015,-12) 29(3.015,-12) 30(4.015,-12) 31(5.011,-12) 32(6.015,-12) 33(7.015,-12) 34(8.015,-12) 52(7.984,12) 53(6.984,12) 54(5.984,12) 55(4.984,12) 56(3.984,12) 57(2.984,12) 58(1.985,12) 59(0.985,12) 60(-0.015,12) 61(-1.015,12) 62(-2.015,12) 63(-3.015,12) 64(-4.015,12) 65(-5.015,12) 66(-6.015,12) 67(-7.015,12) 68(-8.015,12)
  silkscreen extent -12.02,-12 12,12
"SIM HOLDER 2" [mm]
  rect 2.5x0.8 smd: 1(-0.127,0) 2(-0.127,-1.27) 3(-0.127,-2.54) 4(-0.127,-3.81) 5(-0.127,-5.08) 6(-0.127,-6.35) 7(-0.127,-7.62) 8(-0.127,-8.89) 9(-0.127,-10.033) 10(-0.127,-11.176)
  rect 3.6x1.1 smd: 8(23.444,-13.335) 8(23.444,6.731)
  silkscreen extent -1.27,-12.83 26.42,6.22
SMB [mm] "DO-214-AA/SMB; 2 C-Bend Leads; Body 5.3 x 3.6 mm, inc. leads (LxW)"
  rect 2.3x2.3 smd: 1(-2.25,0) 2(2.25,0)
  silkscreen extent -3.8,-1.55 4.1,1.55
SOIC20_N [mm] "SOIC, 20-Leads, Body 12.8x7.6mm, Pitch 1.27mm, IPC Medium Density"
  oval 2.3x0.6 smd: 1(-4.55,5.715) 2(-4.55,4.445) 3(-4.55,3.175) 4(-4.55,1.905) 5(-4.55,0.635) 6(-4.55,-0.635) 7(-4.55,-1.905) 8(-4.55,-3.175) 9(-4.55,-4.445) 10(-4.55,-5.715) 11(4.55,-5.715) 12(4.55,-4.445) 13(4.55,-3.175) 14(4.55,-1.905) 15(4.55,-0.635) 16(4.55,0.635) 17(4.55,1.905) 18(4.55,3.175) 19(4.55,4.445) 20(4.55,5.715)
  silkscreen extent -4.67,-6.5 3,6.69, body extent -3.75,-6.4 3.75,6.4, height 2.65
sot223 [mm] "SOT-223/SC-73; 4 Leads; Body 6.7 x 7.3 mm, inc. leads (LxW max)"
  rect 1.1x2.15 smd: 1(-2.3,-3.1) 2(0,-3.1) 3(2.3,-3.1)
  rect 3.5x2.15 smd: 4(0,3.1)
  silkscreen extent -3.35,-4.85 3.35,1.62
SWICH [mil]
  rect 47.24x98.43 smd: 1(-90,130) 1(-90,-130) 2(90,130) 2(90,-130)
  silkscreen extent -140,-190 140,190
trance [mm]
  round 2.5 hole 1.5: 1(0,0) 2(10.033,0) 3(0,-11.049) 4(10.033,-11.049) ""(5.08,-11.049)
  silkscreen extent -4.95,-13.08 14.99,2.03
TS5B_N [mm] "D2-PAK, 6-Leads, Body 8.6x10.2mm, Pitch 1.7mm, Lead Span 14.1mm, IPC Medium Density"
  rect 3.2x1.05 smd: 1(-6,3.4) 2(-6,1.7) 3(-6,0) 4(-6,-1.7) 5(-6,-3.4)
  rect 9.3x10.45 smd: 6(3.81,0)
  silkscreen extent -6.12,-5.2 -1.1,5.2, body extent -3.35,-5.2 6.05,5.2, height 4.65

## Part data
C1 C2 C28 C31 C32 C35 C37 C38 C39 C40 C41 C42 C43 C44 C45 C46 C50 C51 C52 C68 C69 C70 C72 C73 C74 C75 C76 C77: library part Cap, "Capacitor"
C3 C4 C19 C20: library part "CAPACITOR POL", "Capacitor"
C5 C6 C7 C8 C9 C13 C14 C15 C21 C22 C23 C24 C25 C26 C54 C59 C63: library part CAP
C10 C11 C12 C16 C17 C18 C36 C47 C48 C53 C60 C64 C67 C71: library part "Cap Pol1", "Polarized Capacitor (Radial)"
C27 C29 C30 C49 C61 C62: library part CAP, "Capacitor"
C33 C34 C55 C56 C57 C58 C65 C66: library part "CAP NP"
CN1: library part "HEADER 5X2"
D1: library part Bridge2, "Diode Bridge"
D2 D3: "Default Diode"
D4 D7 D15 D16 D23: library part LED1, "Typical RED GaAs LED"
D5 D6: library part "D Schottky", "Schottky Diode"
D8 D9 D10 D11 D12 D13 D14 D17 D18 D19 D20 D21 D22: library part LED3, "Typical BLUE SiC LED"
F1: library part FUSE2, "Fuse"
J-LINK: library part "Header 10X2", "Header, 10-Pin, Dual row"
K1 K2 K3 K4 K5: library part "RELAY DPDT-G6HU"
L1 L2 L3 L4 L5 L6 L7 L8 L9 L10: library part Inductor, "Inductor"
MIC MIC P7: library part "Header 2H", "Header, 2-Pin, Right Angle"
NETLIGHT STATUS: library part LED0, "Typical INFRARED GaAs LED"
OP1 OP4 OP5 OP6 OP7 OP8 OP9 OP10 OP11: library part Optoisolator1, "4-Pin Phototransistor Optocoupler"
P1 P2: library part "Header 12", "Header, 12-Pin"
P3 P4: library part "Header 5", "Header, 5-Pin"
P5: library part "Header 4H", "Header, 4-Pin, Right Angle"
P6: library part Anten
R1 R2 R3 R4 R5 R6 R7 R8 R9 R10 R11 R14 R15 R16 R17 R19 R23 R24 R26 R27 R34 R35 R40 R41 R42 R43 R46 R47 R48 R49 R53 R54 R56 R57 R58 R61 R62 R63 R66 R67 R68 R69 R70 R71 R75 R76 R77 R78 R79: library part "Res Semi", "Semiconductor Resistor"
R12 R13 R18 R20 R21 R22 R25 R28 R29 R30 R31 R32 R33 R36 R37 R38 R39 R44 R45 R50 R51 R52 R55 R59 R60 R64 R65 R72 R73 R74 R80 R81: library part Res1, "Resistor"
S1: library part Component_1_1
SIM1: library part "SIM HOLDER"
SW1 SW2 SW3 SW4 SW5: library part SW-PB
T1 T2: library part "Trans Ideal", "Transformer (Ideal)"
U1: "STM32 ARM-based 32-bit MCU with 128 Kbytes Flash, 64-pin LQFP, Industrial Temperature"
U2 U3: "SIMPLE SWITCHER® 3A Step-Down Voltage Regulator, 5-pin TO-263"
U4 U5 U6: library part "Volt Reg", "Voltage Regulator"
U7: "Integrated DTMF Transceiver with Intel Micro Interface"
U8 U13: library part MAX232, "DUAL EIA-232 DRIVER/RECEIVER"
U9 U14: "High-Voltage, High-Current Darlington Array"
U11: library part LM386M-1, "Low-Voltage Audio Power Amplifier"
U15: "8-bit AVR Microcontroller, 8KB Flash, 512 Bytes EEPROM, 1KB SRAM, 32-pin TQFP, Industrial Grade (-40°C to 85°C)"
X1 X2 X5: library part 16.000MHZ, "Crystal Oscillator"
X4: library part XTAL, "Crystal Oscillator"

## Free pads (board coordinates)
  oct 118.11x118.11 hole 59.06: 0(7215,-3765.51)
  round 255.91 hole 137.8: ""(177,-5728.51) ""(177,-177) ""(8878.12,-5728.51) ""(8878.12,-177)

## Via types
v1: diameter 50, hole 28, Top Layer to Bottom Layer, tented both sides, 187 vias
v2: diameter 47, hole 28, Top Layer to Bottom Layer, tented both sides, 130 vias
v3: diameter 42, hole 28, Top Layer to Bottom Layer, tented both sides, 79 vias
v4: diameter 45, hole 28, Top Layer to Bottom Layer, tented both sides, 29 vias
v5: diameter 46, hole 28, Top Layer to Bottom Layer, tented both sides, 10 vias
v6: diameter 47, hole 28, Top Layer to Bottom Layer, 4 vias
v7: diameter 35, hole 28, Top Layer to Bottom Layer, tented both sides, 3 vias
v8: diameter 48, hole 28, Top Layer to Bottom Layer, tented both sides, 1 vias
v9: diameter 44, hole 28, Top Layer to Bottom Layer, tented both sides, 1 vias

## Nets (pads, with @x,y where several pads share a name; then routed paths per layer and width w, separated by ;. In a path a pad name is that pad's centre, name@x,y a point inside that pad or via, vN(x,y) a via of type N, cw(c..) or ccw(c..) an arc to the next point about the centre after c; other vN are vias at no path point)
2.5V: C15.1 C18.1 C35.2 C37.2 U4.2 U10.5 U10.7 U10.24 U10.31 | length 6699.7
  Top Layer w10: 5815,-1865.51 5850,-1900.51 5850,-2490.51 5865,-2505.51 C35.2@5865,-2563.9 ; v1(6120,-1865.51) 6260,-1865.51 6297.28,-1902.8 U10.24@6297.28,-1957.8 ; v5(6125,-2175.51) 6173.43,-2127.09 U10.31@6246.1,-2127.09 ; v1(6695,-2070.51) 6658.11,-2107.4 U10.7@6565,-2107.4 6513.11,-2107.4 6505,-2115.51 6505,-2140.51 6511.26,-2146.77 U10.5@6565,-2146.77 6747.26,-2146.77 6775,-2174.51 6775,-2240.51 6853.75,-2319.26 C37.2@6915,-2319.26
  Top Layer w25: C18.1@4087,-345.51 4087,-472.51 4155,-540.51 4215,-540.51 4260,-585.51 4260,-710.51 4237.4,-733.11 C15.1@4175,-733.11 4175,-790.51 4165,-800.51 4050,-800.51 4030,-820.51 U4.2@4030,-893.46 4030,-1000.51 4055,-1025.51 4225,-1025.51 4470,-1270.51 4470,-1720.51 4615,-1865.51 5815,-1865.51 v1(6120,-1865.51)
  Bottom Layer w10: v1(6120,-1865.51) 6165,-1910.51 6165,-2135.51 v5(6125,-2175.51)
  Bottom Layer w16: v1(6120,-1865.51) 6165,-1820.51 6650,-1820.51 6695,-1865.51 v1(6695,-2070.51)
2.8V: C14.1 C16.1 C40.2 C41.2 R81.1 U6.2 U10.38 U10.43 U10.45 | length 7829.9
  Top Layer w10: v5(5910,-1920.51) 5910,-2270.51 6010,-2370.51 6290,-2370.51 6316.97,-2343.54 U10.38@6316.97,-2276.69 ; C41.2@6415.39,-2560.88 C41.2@6412.38,-2563.9 ; U10.43@6415.39,-2276.69 6415.39,-2215.91 6420.79,-2210.51 6450,-2210.51 6454.76,-2215.28 U10.45@6454.76,-2276.69 6454.76,-2465.75 6412.38,-2508.13 C41.2@6412.38,-2563.9 ; v1(6680,-2745.51) 6585,-2745.51 6550,-2710.51 6550,-2615.51 6536,-2601.51 6449.99,-2601.51 C41.2@6412.38,-2563.9
  Top Layer w12: v1(6825,-2195.51) 6825,-2240.51 6854,-2269.51 7148,-2269.51 7191,-2312.51 v1(7251,-2312.51)
  Top Layer w16: C14.1@4505,-660.51 4545,-660.51 4560,-675.51 4560,-775.51 4512.5,-823.01 U6.2@4512.5,-893.46 ; v1(6825,-2195.51) 6852.5,-2223.01 C40.2@6915,-2223.01
  Top Layer w25: C16.1@4369,-345.51 4369,-459.51 4505,-595.51 C14.1@4505,-660.51 ; U6.2@4512.5,-893.46 4512.5,-983.01 4545,-1015.51 4645,-1015.51 4730,-1100.51 4730,-1610.51 4900,-1780.51 v5(5910,-1780.51) v1(6120,-1780.51)
  Bottom Layer w10: v5(5910,-1920.51) v5(5910,-1780.51)
  Bottom Layer w12: v1(7251,-2312.51) 7477,-2312.51 7573,-2408.51 v2(7573,-2642.51)
  Bottom Layer w25: v1(6120,-1780.51) 6730,-1780.51 6825,-1875.51 v1(6825,-2195.51) 6825,-2705.51 6785,-2745.51 v1(6680,-2745.51) v1@6670,-2745.51
3.3V: C13.1 C17.1 C38.2 C42.2 L6.2 S1.4 U5.2 U10.6 U10.14 U10.19 U10.26 U10.32 | length 11965.9
  Top Layer w10: U10.32@6246.1,-2146.77 6188.74,-2146.77 6170,-2165.51 6170,-2235.51 6105,-2300.51 6015,-2300.51 5950,-2235.51 v1(5950,-1975.51) 6085,-1975.51 6138.15,-2028.66 U10.26@6246.1,-2028.66 ; v1(6295,-1720.51) 6395.71,-1821.22 U10.19@6395.71,-1957.8 ; U10.14@6494.13,-1957.8 6494.13,-1901.38 6520,-1875.51 6765,-1875.51 6805,-1915.51 ; v1(6515,-1720.51) 6610,-1720.51 6805,-1915.51 ; U10.6@6565,-2127.09 6914.68,-2127.09 C38.2@6915,-2126.76 C42.2@6915,-2030.51 ; v1(7280,-2080.51) 6965,-2080.51 C42.2@6915,-2030.51 ; 6805,-1915.51 6805,-2000.51 6835,-2030.51 C42.2@6915,-2030.51
  Top Layer w16: U5.2@4995,-893.46 v3(4995,-915.51) 4995,-980.51 5030,-1015.51 5100,-1015.51 5150,-1065.51 ; C13.1@5135,-733.11 5130,-738.11 5130,-780.51 5150,-800.51 5150,-1065.51 ; v1(6295,-1720.51) 6030,-1720.51 v1(5950,-1640.51) 5550,-1640.51 5150,-1240.51 5150,-1065.51 ; v1(8059,-2571.51) 8058,-2572.51 8353,-2867.51 8353,-4668.51 8400,-4715.51 S1.4@8480,-4715.51
  Top Layer w25: C13.1@5135,-733.11 5187.4,-733.11 5215,-705.51 C17.1@5215,-345.51
  Bottom Layer w10: v1(5950,-1975.51) v1(5950,-1640.51)
  Bottom Layer w16: v1(6295,-1720.51) v1(6515,-1720.51) ; v1(7280,-2080.51) 7568,-2080.51 v1(8059,-2571.51)
  Bottom Layer w25: v1(4670,-2195.51) 4765,-2290.51 5400,-2290.51 5485,-2205.51 5485,-1785.51 4995,-1295.51 v3(4995,-915.51)
4V: K1.2 M1.55 M1.56 M1.57 NETLIGHT.1 STATUS.1 U14.9 | length 14282.2
  Top Layer w10: v1(5558,-348) 5520,-386 5520,-1432 5633.51,-1545.51 6318.14,-1545.51 6356.34,-1507.32 6356.34,-1357.34 6327,-1328 U14.9@5824,-1328 ; v1(6580,-350.51) v2(6875,-350.51) v2(7160,-350.51)
  Top Layer w16: v2(8165.5,-971.75) M1.55@8392.44,-971.75 ; v2(8165.5,-893.01) M1.57@8392.44,-893.01 ; M1.56@8392.44,-932.38 v2(8619.38,-932.38)
  Bottom Layer w10: 6441,-217.51 6447,-217.51 v1(6580,-350.51)
  Bottom Layer w40: v2(8165.5,-971.75) 8165.5,-844.01 8390,-619.51 ; 8390,-622.51 8619.38,-851.9 v2(8619.38,-932.38)
  Bottom Layer w50: K1.2@2885,-1875.51 2970,-1875.51 3000,-1845.51 3000,-1250.51 2900,-1150.51 1920,-1150.51 1845,-1075.51 1845,-895.51 1920,-820.51 3550,-820.51 3970,-400.51 5505.49,-400.51 v1(5558,-348) 5688.49,-217.51 6441,-217.51 ; 6447,-217.51 8274,-217.51 8390,-333.51 8390,-619.51
5V: C33.2 C55.2 J-LINK.19 K1.9 L1.1 L2.1 L3.1 L7.2 L9.1 L10.2 OP4.4 OP5.4 OP6.4 OP7.4 OP10.4 OP11.4 P5.1 R4.2 U8.16 U13.16 | length 33350
  Top Layer w10: 905,-5840.51 975,-5770.51 v1(975,-5700.51) ; v1(2155,-4749.08) OP4.4@2265,-4749.08 ; v1(2155,-4523.37) OP5.4@2265,-4523.37 ; v1(2155,-4297.66) OP6.4@2265,-4297.66 ; v1(2155,-4071.94) v1(2265,-4071.94) ; v1(3845,-4855.51) C55.2@3848.2,-4855.51 ; U13.16@3999.49,-5075.51 4045,-5030 4045,-4770.51 v1(4035,-4760.51)
  Top Layer w12: v1(55,-5155.51) 55,-5400.51 185,-5530.51 355,-5530.51 665,-5840.51 905,-5840.51 2095,-5840.51 ; J-LINK.19@2145,-5735.51 2145,-5790.51 2095,-5840.51 ; K1.9@2595,-1875.51 2670,-1875.51 2730,-1935.51 2730,-2170.51 2980,-2420.51 3400,-2420.51 3578.75,-2599.26 3578.75,-2731.76 ; P5.1@4015,-5766.61 3936.1,-5766.61 3875,-5705.51 3455,-5705.51 3320,-5840.51 2095,-5840.51 ; v2(4215,-4720.51) 4765,-4720.51 4835,-4790.51 4835,-5025.51 4785,-5075.51 U8.16@4654.49,-5075.51 ; C33.2@4514.93,-4855.51 4514.93,-4790.58 4585,-4720.51
  Top Layer w16: R4.2@3578.75,-2915.51 3578.75,-2731.76 3665,-2645.51 3665,-2180.51 3800,-2045.51 4805,-2045.51 4860,-2100.51 ; v1(4270,-250.51) 4270,-440.51 4385,-555.51 L3.1@4385,-612.91 ; L10.2@4800.71,-2195.51 4800.71,-2139.8 4840,-2100.51 4860,-2100.51 ; L7.2@5585,-2195.51 L9.1@5455,-2195.51 5455,-2135.51 5420,-2100.51 4860,-2100.51
  Top Layer w20: L2.1@3925,-610.51 3925,-305.51 3980,-250.51 v1(4270,-250.51) 5035,-250.51 5065,-280.51 5065,-495.51 5030,-530.51 4895,-530.51 4880,-545.51 L1.1@4880,-610.51
  Bottom Layer w10: v1(975,-5700.51) 975,-5200.51 1005,-5170.51 ; v1(2155,-4749.08) 2131.43,-4749.08 1915,-4965.51 1210,-4965.51 1005,-5170.51 ; v1(2260,-3390.51) v1(2260,-3150.51) ; v1(2265,-4071.94) v1@2265,-3395.51 ; v1(3845,-4855.51) 3845,-4690.51 3905,-4630.51 ; v2(4215,-4720.51) 4075,-4720.51 v1(4035,-4760.51) 3905,-4630.51 ; 1005,-5170.51 1748,-5170.51 1857,-5279.51 1998,-5279.51 2020,-5257.51 2020,-5035.51 2110,-4945.51 2680,-4945.51 2825,-4800.51 2825,-4320.51 3010,-4135.51 3770,-4135.51 3905,-4270.51 3905,-4630.51
  Bottom Layer w12: v1(55,-5155.51) 55,-1050.51 115,-990.51 680,-990.51 740,-1050.51 740,-1450.51 835,-1545.51 1560,-1545.51
  Bottom Layer w16: v1(2155,-4749.08) v1(2155,-4523.37) v1(2155,-4297.66) v1(2155,-4071.94)
  Bottom Layer w47.24: K1.9@2585,-1875.51 2665,-1875.51 2685,-1855.51 2685,-1655.51 2575,-1545.51 1560,-1545.51 1495,-1480.51 1495,-865.51 1630,-730.51 3500,-730.51 3980,-250.51 v1(4270,-250.51)
10.8V: C3.1 C4.1 C5.1 C6.1 D2.2 U2.1 U3.1 | length 5327.2
  Top Layer w10: C6.1@2600,-1395.51 2600,-1480.51 2660,-1540.51 2985,-1540.51 ; U2.1@2656.14,-656.81 2656.14,-579.37 2675,-560.51 3010,-560.51 3040,-590.51 3040,-1485.51 2985,-1540.51 ; C5.1@3655,-1390.51 3655,-1445.51 3560,-1540.51 2985,-1540.51
  Top Layer w39.37: 2191,-351.51 2350,-510.51 3075,-510.51 3111.14,-546.65 U3.1@3111.14,-656.81 ; C3.1@2248,-608.85 2548.33,-608.85 2596.3,-656.81 U2.1@2656.14,-656.81
  Top Layer w50: D2.2@1670,-870.51 2086,-870.51 2191,-765.51 C3.1@2191,-608.51 2191,-351.51 C4.1@2191,-255.51
12V: F1.1 P2.1 | length 772
  Top Layer w39.37: P2.1@465,-690.51 P2.1@465,-685.51
  Top Layer w50: P2.1@465,-685.51 465,-560.51 540,-485.51 F1.1@1075,-485.51
  Bottom Layer w50: P2.1@465,-685.51 P2.1@465.91,-685.51
12V-GND: D3.2 P2.2 | length 1356.1
  Top Layer w50: P2.2@465,-885.51 990,-885.51 1160,-715.51 1600,-715.51 1650,-665.51 D3.2@1650,-585.51